# EAGLE board PowerCapV2 (EAGLE 7.6.0)
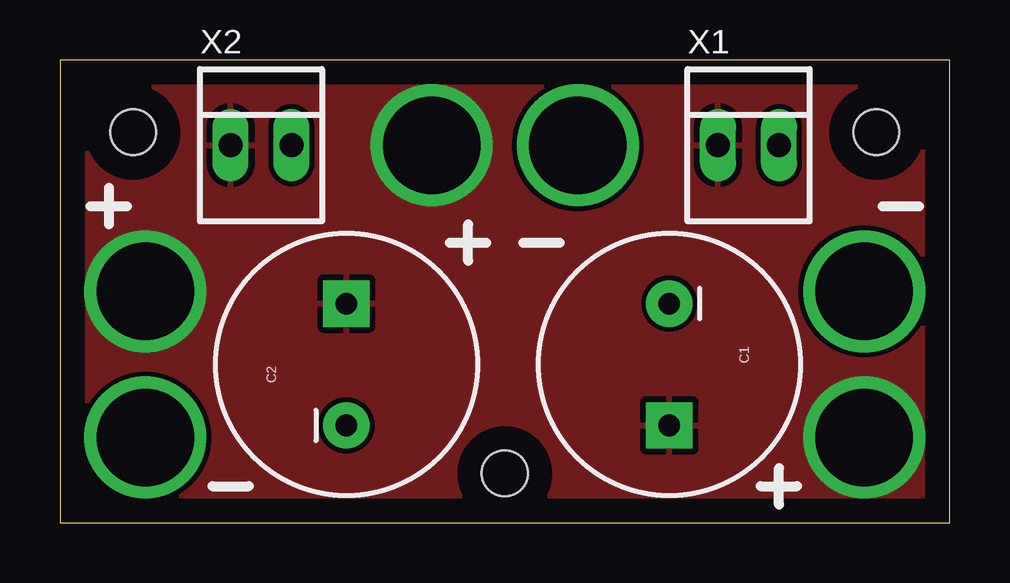
[diagram p0: board, top side]
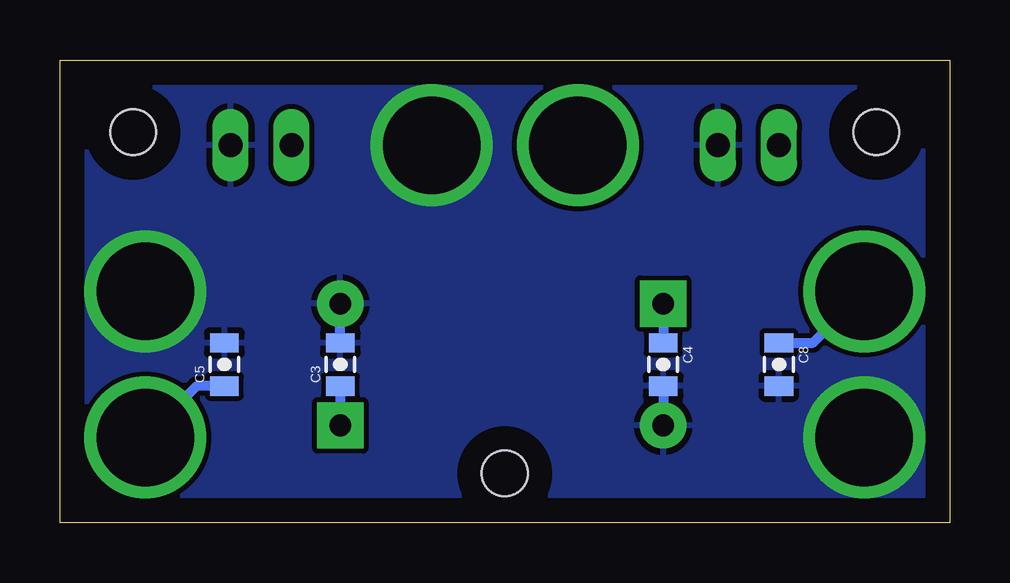
[diagram p1: board, bottom side, seen from below]

Size 37.08 x 19.3 mm. Coordinates in mm from the lower left corner, seen from the top.
Outline: 0,0 37.08,0 37.08,19.3 0,19.3 0,0
Copper layers (1*16): Top 0.035mm / dielectric 1.5mm / Bottom 0.035mm
Design rules "default": minimum track width 10mil, minimum drill 24mil, track to track 8mil, track to pad 8mil, pad to pad 8mil, via to via 8mil, smd to smd 8mil, copper to edge 40mil, drill to drill 8mil, minimum pad ring 10mil, minimum via ring 8mil, stop-mask expansion 4mil, vias tented up to drill 0mil, thermal gap 10mil
Holes 1.91 mm at 18.54,2.06 3.05,16.29 34.04,16.29

## Footprints (pad centres in the part's own frame; a part is rotated, then mirrored left to right if it is on the bottom)
CPOL-RADIAL-1000UF-25V = drill 0.9 pad 1.93 square: + 2.54,0 | drill 0.9 pad 1.93: - -2.54,0
0805-CAP = smd 0.8 x 1.2: 1 -0.9,0; 2 0.9,0
22-23-2021 = drill 1 long: 1 -1.27,0; 2 1.27,0

## Placement (x,y rotation side)
C1  [CPOL-RADIAL-1000UF-25V]  25.4,6.6 270 top
C2  [CPOL-RADIAL-1000UF-25V]  11.94,6.6 90 top
C3  1uF  [0805-CAP]  25.4,6.6 90 bottom
C4  1uF  [0805-CAP]  11.94,6.6 270 bottom
C5  1uF  [0805-CAP]  30.23,6.6 90 bottom
C8  1uF  [0805-CAP]  7.11,6.6 270 bottom
X1  22-23-2021  [22-23-2021]  28.7,15.75 0 top
X2  22-23-2021  [22-23-2021]  8.38,15.75 0 top

## Library data of the parts
C1-C5 C8 = SparkFun-Capacitors
X1 X2 = con-molex; MF: MOLEX; MPN: 22-23-2021; OC_FARNELL: 1462926; OC_NEWARK: 25C3832

## Nets
GND: C1.- C2.- C3.2 C4.2 C5.2 C8.2 X1.2 X2.2
VBAT: C1.+ C2.+ C3.1 C4.1 C5.1 C8.1 X1.1 X2.1

## Tracks (layer width: path | path; a pad name or v marks a point on that pad's centre or on a via)
GND  (via drill 4.06)
  Bottom 0.406: C4.2 C2.- | C3.2 C1.-
  other vias: 3.56,3.56 33.53,9.65 21.59,15.75
  pour Bottom: 0,19.3 37.08,19.3 37.08,0 0,0
VBAT  (via drill 4.06)
  Bottom 0.406: C2.+ C4.1 | C3.1 C1.+ | C8.1 5.7,7.5 v3.56,9.65 | C5.1 31.38,5.7 v33.53,3.56
  other vias: 15.49,15.75
  pour Top: 0,19.3 37.08,19.3 37.08,0 0,0